# Altium PCB blank_application_board.PcbDoc
Units mil, origin at the board's own origin, x right, y up, seen from the top; angles counter-clockwise.
Board outline 5955.5 x 3149.6 mil, 4 copper layers (Top Layer, Signal Layer 1, Signal Layer 2, Bottom Layer), stack 65.118 mil thick; 3 components, 139 nets, 111 pads, 0 vias.
Unrouted connection lines stored in the file: 25.
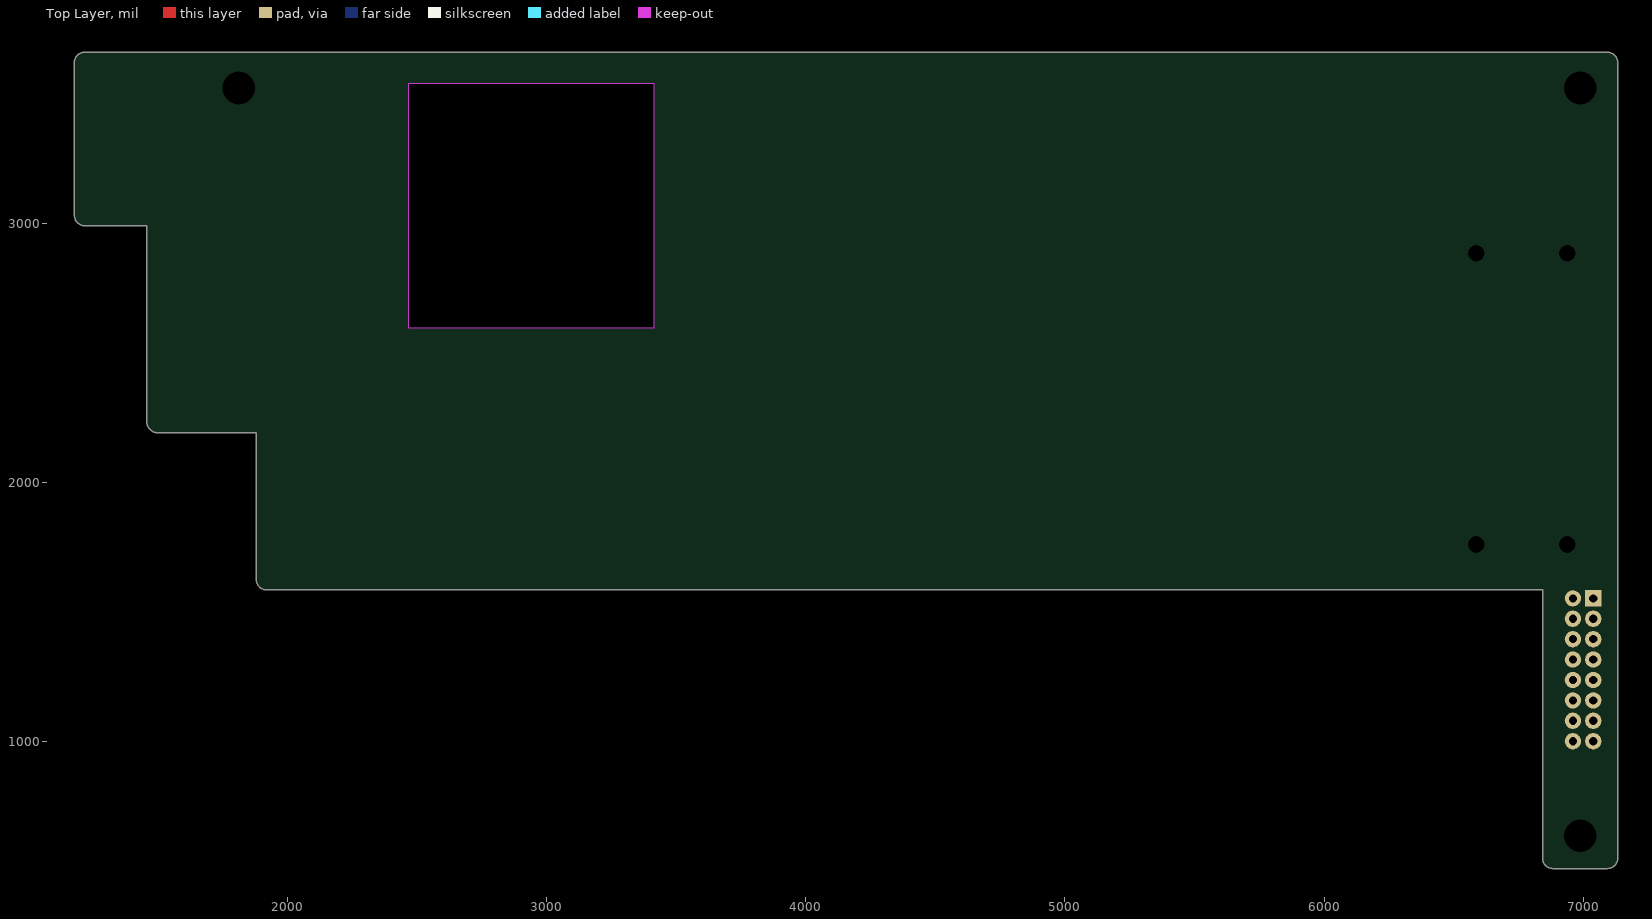
[diagram p0: Top Layer view]
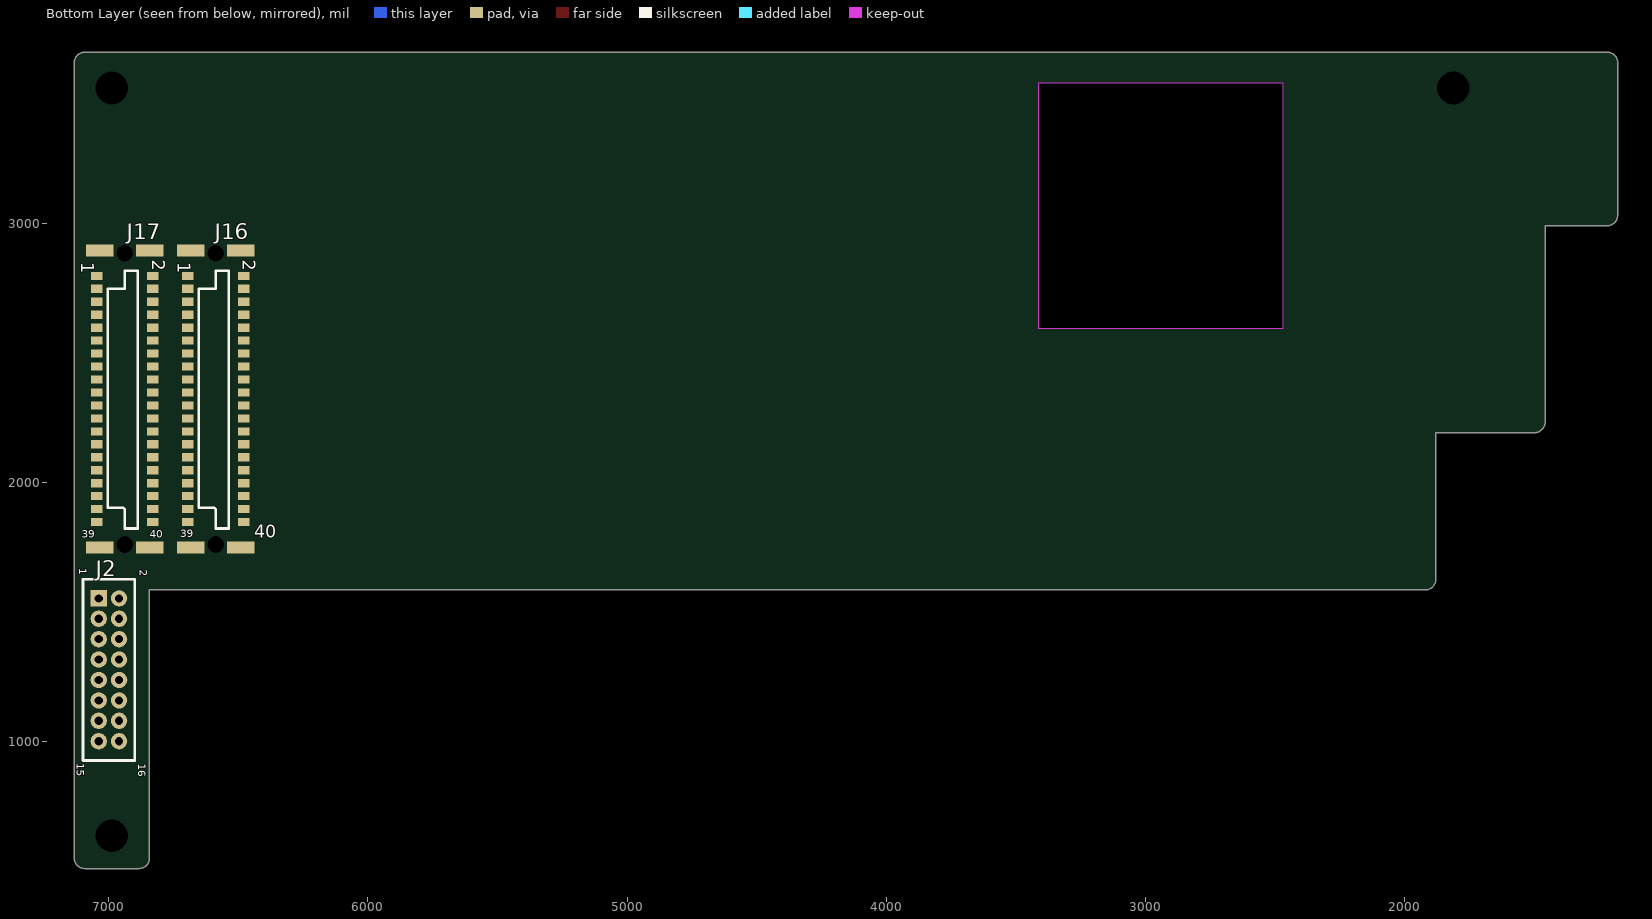
[diagram p1: Bottom Layer view, seen from below]

## Layer stack, top to bottom
Top Solder: solder mask 0.3937, Solder Resist, Dk 3.5
Top Layer: signal copper 2.7559
Dielectric 1: core 7.0866, FR-4, Dk 4.2
Signal Layer 1: signal copper 0.6693
Core: prepreg 44.0945, FR-4, Dk 4.2
Signal Layer 2: signal copper 0.6693
Dielectric 2: core 7.0866, FR-4, Dk 4.2
Bottom Layer: signal copper 2.7559
Bottom Solder: solder mask 0.3937, Solder Resist, Dk 3.5

## Board outline
1496.06,2193.12 cw(c1501.86,2238.29) 1456.69,2244.09 1456.69,2992.13 1220.47,2992.13 cw(c1218.57,3033.4) 1177.3,3031.5 1177.3,3621.87 cw(c1216.67,3621.87) 1216.67,3661.24 7093.43,3661.24 cw(c7093.43,3621.87) 7132.8,3621.87 7132.8,551.01 cw(c7093.43,551.01) 7093.43,511.64 6882.17,511.64 cw(c6882.17,551.01) 6842.8,551.01 6842.8,1587.06 1918.87,1587.06 cw(c1918.87,1626.43) 1879.5,1626.43 1879.5,2193.12
cut-out: 2467.41,2596.76 2467.41,3541.68 3412.29,3541.68 3412.29,2596.8

## Design rules (kind name [scope] priority, off if disabled: settings)
BoardOutlineClearance [All] p1: gap=7.87 ignorepadtopadclearanceinfootprint=FALSE except(15.75: Arc-SplitBarrior Arc-SplitContinuation Track-SplitBarrior Track-SplitContinuation SMDPad-SplitBarrior SMDPad-SplitContinuation THPad-SplitBarrior THPad-SplitContinuation Via-SplitBarrior Via-SplitContinuation Fill-SplitBarrior Fill-SplitContinuation Poly-SplitBarrior Poly-SplitContinuation Region-SplitBarrior Region-SplitContinuation Text-SplitBarrior Text-SplitContinuation)
Clearance "Clearance Bottom Layer" [OnLayer('Bottom Layer')] p1: gap=8 ignorepadtopadclearanceinfootprint=TRUE except(10: Arc-Text Track-Text SMDPad-Text THPad-Text Via-Text Fill-Text Poly-Text Region-Text Text-Text)
Clearance "Clearance Top Layer" [OnLayer('Top Layer')] p2: gap=8 ignorepadtopadclearanceinfootprint=TRUE except(10: Arc-Text Track-Text SMDPad-Text THPad-Text Via-Text Fill-Text Poly-Text Region-Text Text-Text)
Clearance [All] p3: gap=7.87 ignorepadtopadclearanceinfootprint=FALSE except(3.5: Arc-Arc Arc-Track Arc-SMDPad Track-Track Track-SMDPad SMDPad-SMDPad; 10: Arc-Text Track-Text SMDPad-Text THPad-Text Via-Text Fill-Text Poly-Text Region-Text Text-Text)
HoleSize [All] p1: absolutevalues=TRUE maxlimit=248.03 minlimit=7.87 maxpercent=80.000 minpercent=20.000
MinimumAnnularRing [All] p1: minimumring=3
MinimumSolderMaskSliver [All] p1: minsoldermaskwidth=3.94
PolygonConnect PolygonConnect_1 [All] p1: thpad.connectstyle=Relief thpad.reliefconductorwidth=20 thpad.reliefentries=4 thpad.polygonreliefangle="90 Angle" thpad.airgapwidth=10 smdpad.connectstyle=Relief smdpad.reliefconductorwidth=20 smdpad.reliefentries=4 smdpad.polygonreliefangle="90 Angle" smdpad.airgapwidth=10 via.connectstyle=Direct via.reliefconductorwidth=20 via.reliefentries=4 via.polygonreliefangle="90 Angle" via.airgapwidth=10
RoutingCorners [All] p1: cornerstyle=Round minsetback=100 maxsetback=100
RoutingVias [All] p1: holewidth=19.68 width=39.37 viastyle="Through Hole" minholewidth=7.87 minwidth=17.72 maxholewidth=39.37 maxwidth=78.74
SolderMaskExpansion [All] p1: expansion=4
Width [All] p1: maxlimit=100 minlimit=3.5 preferedwidth=5
27 further rules are at their usual default settings.

## Components (designator, comment, footprint, x,y, rotation, side; value= is the part's Value field where it differs from the comment)
J2 "DF11-16DP-2DSA(01)" DF11-16DP-2DSA(01)_FLIP 6999.3,1278.64 r270 bottom locked
J16 "M55-7004042R" M55-7004042R_FLIP 6587.3,2323.64 r270 bottom locked
J17 "M55-7004042R" M55-7004042R_FLIP 6938.3,2323.64 r270 bottom locked

## Footprints (in the part's own frame and the unit in brackets; to place one, negate y for a bottom-side part, rotate by r counter-clockwise, add the part's x,y. Pads: shape width x height; smd on the part's side, far side on the other; paste and mask are expansions set on the pad)
DF11-16DP-2DSA(01)_FLIP [mm]
  rect 1.6x1.6 hole 0.8: 1(-7,-1)
  round 1.6 hole 0.8: 2(-7,1) 3(-5,-1) 4(-5,1) 5(-3,-1) 6(-3,1) 7(-1,-1) 8(-1,1) 9(1,-1) 10(1,1) 11(3,-1) 12(3,1) 13(5,-1) 14(5,1) 15(7,-1) 16(7,1)
  silkscreen extent -8.89,-2.54 8.89,2.54, body extent -9,-2.5 9,2.5, height 6.6
M55-7004042R_FLIP [mm] "M55-7004042R"
  rect 0.8x1.1 smd: 1(-12.065,-2.75) 2(-12.065,2.75) 3(-10.795,-2.75) 4(-10.795,2.75) 5(-9.525,-2.75) 6(-9.525,2.75) 7(-8.255,-2.75) 8(-8.255,2.75) 9(-6.985,-2.75) 10(-6.985,2.75) 11(-5.715,-2.75) 12(-5.715,2.75) 13(-4.445,-2.75) 14(-4.445,2.75) 15(-3.175,-2.75) 16(-3.175,2.75) 17(-1.905,-2.75) 18(-1.905,2.75) 19(-0.635,-2.75) 20(-0.635,2.75) 21(0.635,-2.75) 22(0.635,2.75) 23(1.905,-2.75) 24(1.905,2.75) 25(3.175,-2.75) 26(3.175,2.75) 27(4.445,-2.75) 28(4.445,2.75) 29(5.715,-2.75) 30(5.715,2.75) 31(6.985,-2.75) 32(6.985,2.75) 33(8.255,-2.75) 34(8.255,2.75) 35(9.525,-2.75) 36(9.525,2.75) 37(10.795,-2.75) 38(10.795,2.75) 39(12.065,-2.75) 40(12.065,2.75)
  rect 1.2x2.7 smd: GND(-14.56,-2.45) GND(-14.56,2.45) GND(14.56,-2.45) GND(14.56,2.45)
  round 0 hole 1.65 unplated: ""(-14.275,0) ""(14.275,0)
  silkscreen extent -12.57,-1.65 12.7,1.27, body extent -15.24,-3.6 15.24,3.6, height 6.75

## Part data
J2: "Headers & Wire Housings 2MM V PCB HEADER 16P DR THRU-HOLE GLD", Current Rating="2 A", Manufacturer="Hirose Connector", Supplier Part Number 1=H2856-ND, Voltage Rating="250 V", Brand="Hirose Connector", Category="Headers & Wire Housings", ComponentLink1Description=http://www.mouser.com/datasheet/2/185/DF11_catalog-939040.pdf, ComponentLink1URL=http://www.mouser.com/datasheet/2/185/DF11_catalog-939040.pdf, Contact Material=Brass, Contact Plating=Gold, Manufacturer Part Number=DF11-16DP-2DSA(01), Minimum Order Quantity=1, Mounting Angle=Vertical, Mounting Style=-, Number of Positions="16 Position", Number of Rows="2 Row", Packaging=Bulk, Pitch="2 mm", Product=Headers, Reeling=False, RoHS="RoHS Compliant", RoHS - Mouser=Y, Series=DF11, Standard Pack Qty=100, Supplier 1=Digi-Key, Termination Style="Through Hole", Type=Shrouded
J16 J17: "Board to Board & Mezzanine Connectors 40P 1.27 SMC Male", Current Rating="1.2 A", Flammability Rating="UL 94 V-0", Insulation Resistance="10 GOhms", Manufacturer=Harwin, Maximum Operating Temperature="+ 125 C", Minimum Operating Temperature="- 55 C", Supplier Part Number 1=952-3871-1-ND, Voltage Rating="100 V", Brand=Harwin, Category="Board to Board & Mezzanine Connectors", ComponentLink1Description=http://www.mouser.com/datasheet/2/181/M55-70X-1286676.pdf, ComponentLink1URL=http://www.mouser.com/datasheet/2/181/M55-70X-1286676.pdf, Contact Material="Phosphor Bronze", Contact Plating=Gold, Housing Material="Liquid Crystal Polymer (LCP)", Manufacturer Part Number=M55-7004042R, Minimum Order Quantity=1, Mounting Angle=Straight, Mounting Style="Mounting Peg", Number of Positions="40 Position", Number of Rows="2 Row", Packaging="Cut Tape", Pitch="1.27 mm", Product=Headers, Product Status="New Product", Reeling=True, RoHS="RoHS Compliant", RoHS - Mouser=Y, Stack Height="6.75 mm", Standard Pack Qty=500, Supplier 1=Digi-Key, Termination Post Length="4 mm", Termination Style=SMD/SMT, Tradename="Archer Kontrol"

## Free pads (board coordinates)
  round 70 hole 125.98 unplated mask+49.21: J1-18(1812.3,3523.64) J1-18(6987.8,638.49) J1-18(6987.8,3523.64)

## Nets (pads, with @x,y where several pads share a name; then routed paths per layer and width w, separated by ;. In a path a pad name is that pad's centre, name@x,y a point inside that pad or via, vN(x,y) a via of type N, cw(c..) or ccw(c..) an arc to the next point about the centre after c; other vN are vias at no path point)
3V3: J2.3 J2.4
5V: J2.7 J2.8
5V_STANDBY: J2.1
12V: J2.13 J2.14 J2.15 J2.16
ADC0_DM0_RC: J16.37
ADC0_SE16_RC: J16.36
ADC0_SE17_RC: J16.34
ADC0_SE18_RC: J16.29
ADC1_DM0_RC: J16.38
ADC1_DP0_RC: J16.35
ADC1_SE14_RC: J16.16
ADC1_SE15_RC: J16.15
ADC1_SE16_RC: J16.33
ADC1_SE18_RC: J16.31
CAN0_H: J17.33
CAN0_L: J17.34
DAC0_OUT_RC: J17.35
DAC1_OUT_RC: J17.36
FTM0_CH1: J17.14
FTM0_CH2: J17.12
FTM0_CH3: J17.6
GND: J2.5 J2.6 J2.9 J2.10 J2.11 J2.12 J16.2 J16.11 J16.28 J16.39 J16.GND J17.2 J17.13 J17.39 J17.GND
I2C0_SCL: J17.7
I2C0_SDA: J17.5
I2C1_SCL: J17.10
I2C1_SDA: J17.8
NetC1_1: 
NetC2_2: 
NetC4_2: 
NetC6_2: 
NetC8_2: 
NetC11_1: 
NetC11_2: 
NetC12_2: 
NetC14_2: 
NetC16_2: 
NetC18_2: 
NetC20_2: 
NetD1_1: 
NetJ2_2: J2.2
NetJ4_1: 
NetJ4_2: 
NetJ4_3: 
NetJ4_4: 
NetJ4_5: 
NetJ4_6: 
NetJ4_7: 
NetJ4_8: 
NetJ6_1: 
NetJ6_2: 
NetJ6_3: 
NetJ6_4: 
NetJ6_5: 
NetJ6_6: 
NetJ6_7: 
NetJ6_8: 
NetJ10_1: 
NetJ10_2: 
NetJ10_3: 
NetJ10_4: 
NetJ10_5: 
NetJ10_6: 
NetJ10_7: 
NetL1_2: 
NetL2_2: 
NetL3_2: 
NetL4_2: 
NetL5_2: 
NetL6_2: 
NetL7_2: 
NetL8_2: 
NetL9_2: 
NetL12_2: 
NetL13_2: 
NetL14_1: 
NetL14_2: 
NetL15_2: 
NetL16_2: 
NetL17_2: 
NetL18_2: 
NetL21_2: 
NetL22_2: 
NetL23_2: 
NetL24_2: 
NetL25_2: 
NetR17_1: 
NetU2_10: 
NetU12_10: 
PTA4_RC: J16.7
PTA7_RC: J16.32
PTA8_RC: J16.12
PTA10_RC: J16.27
PTA11_RC: J16.22
PTA12_RC: J16.30
PTA13_RC: J16.23
PTA14_RC: J16.24
PTA15_RC: J16.26
PTA17_RC: J16.25
PTB0_RC: J16.21
PTB1_RC: J16.9
PTB2_RC: J16.19
PTB3_RC: J16.14
PTB4_RC: J16.13
PTB5_RC: J16.20
PTB6_RC: J16.17
PTB7_RC: J16.18
PTB18: J17.19
PTB19: J17.20
PTB20: J17.17
PTB21: J17.15
PTB22: J17.18
PTB23: J17.16
PTC0_RC: J16.8
PTC1_RC: J16.10
PTC8_RC: J16.5
PTC9_RC: J16.6
PTC14: J17.4
PTC15: J17.11
PTD4_RC: J16.3
PTD5_RC: J16.4
PTD6_RC: J16.1
PTD7: J17.9
PTD11: J17.1
PTD12: J17.3
PTE6: J17.27
PTE7: J17.30
PTE8: J17.29
PTE11: J17.31
PTE12: J17.32
PTE26: J17.37
PTE28: J17.38
RST_TGTMCU_B: J16.40
SD_CARD_DETECT: J17.22
SDHC0_CMD: J17.26
SDHC0_D0: J17.24
SDHC0_D1: J17.23
SDHC0_D2: J17.28
SDHC0_D3: J17.25
SDHC0_DCLK: J17.21
pads on no net: J16. J17. J17.40

## Other copper
Top Layer:
  region net PTB18: 6892,2340

## Silkscreen, mask and mechanical layers (free items; w line width, h text height)
Mechanical 1:
  circle w0.25: c6999.3,1278.64 r0.12
  circle w0.25: c6938.3,2323.64 r0.12
  circle w0.25: c6587.3,2323.64 r0.12
Mechanical 3:
  circle w0.5: c6987.8,638.49 r60
  circle w0.5: c1812.3,3523.64 r60
  circle w0.5: c6987.8,3523.64 r60
  lines w0.5: 2467.41,2596.8 3412.29,2596.8 3412.29,3541.68 2467.41,3541.68 ; 1177.3,3031.5 ccw(c1218.57,3033.4) 1220.47,2992.13 1456.69,2992.13 1456.69,2244.09 ccw(c1501.86,2238.29) 1496.06,2193.12 1879.5,2193.12 1879.5,1626.43 ccw(c1918.87,1626.43) 1918.87,1587.06 6842.8,1587.06 6842.8,551.01 ccw(c6882.17,551.01) 6882.17,511.64 7093.43,511.64 ccw(c7093.43,551.01) 7132.8,551.01 7132.8,3621.87 ccw(c7093.43,3621.87) 7093.43,3661.24 1216.67,3661.24 ccw(c1216.67,3621.87) 1177.3,3621.87 1177.3,3031.5
  text "ROUTE OUT BOARD CUTOUT" at 2597,3012 h60

## Text inside footprints (layer, text, board x,y; h text height)
J2: Bottom Overlay "1" at 7114,1670 h30 r90; Bottom Overlay "2" at 6880,1665 h30 r90; Bottom Overlay "15" at 7123,917 h30 r90; Bottom Overlay "16" at 6886,916 h30 r90
J16: Bottom Overlay "39" at 6725,1790 h30; Bottom Overlay "2" at 6483,2861 h50 r90; Bottom Overlay "1" at 6733,2852 h50 r90; Bottom Overlay "40" at 6439,1789 h50
J17: Bottom Overlay "39" at 7105,1788 h30; Bottom Overlay "2" at 6832,2861 h50 r90; Bottom Overlay "1" at 7107,2852 h50 r90; Bottom Overlay "40" at 6841,1788 h30